# EAGLE board BRD a circuit (EAGLE 9.3.0)
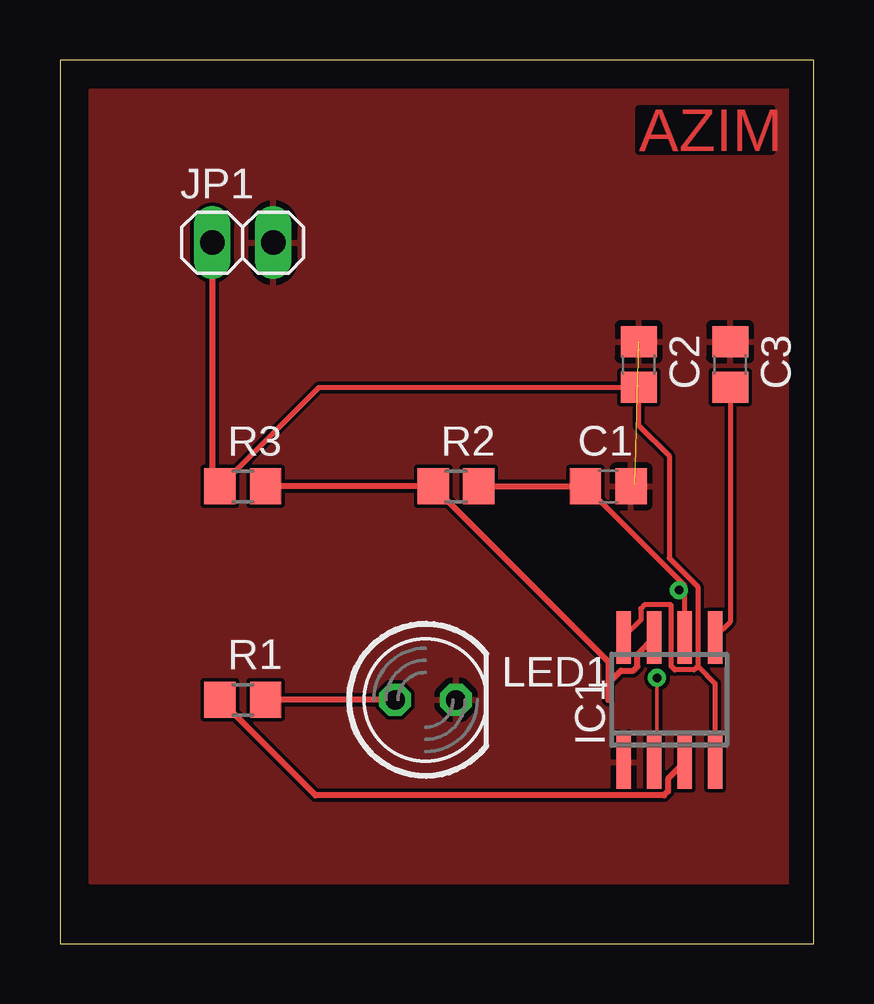
[diagram p0: board, top side]
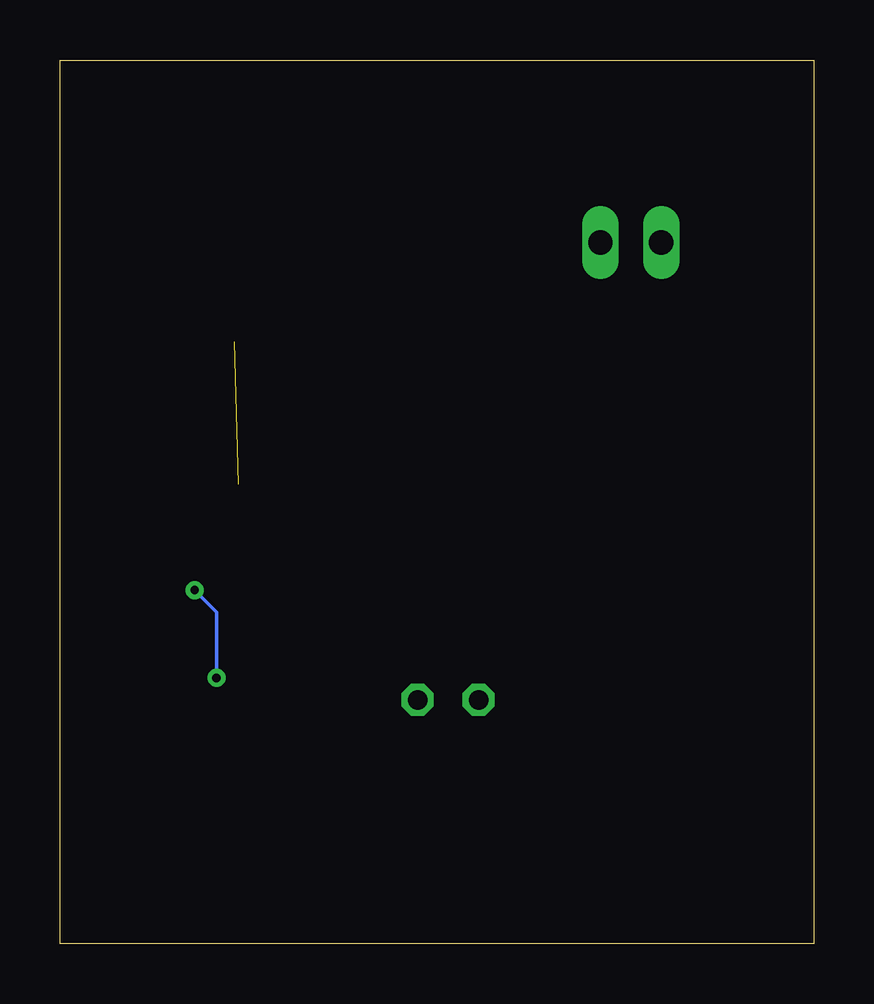
[diagram p1: board, bottom side, seen from below]

Size 31.42 x 36.82 mm. Coordinates in mm from the lower left corner, seen from the top.
Outline: 0,0 31.42,0 31.42,36.82 0,36.82 0,0
Copper layers (1*16): Top 0.035mm / dielectric 1.5mm / Bottom 0.035mm
Design rules "default": minimum track width 6mil, minimum drill 0.35mm, track to track 6mil, track to pad 6mil, pad to pad 6mil, via to via 6mil, smd to smd 6mil, copper to edge 40mil, drill to drill 6mil, minimum pad ring 10mil, minimum via ring 8mil, stop-mask expansion 4mil, vias tented up to drill 0mil, thermal gap 10mil

## Footprints (pad centres in the part's own frame; a part is rotated, then mirrored left to right if it is on the bottom)
C0805 = smd 1.3 x 1.5: 1 -0.95,0; 2 0.95,0
SO08 = smd 0.6 x 2.2: 1 -1.905,-2.6; 2 -0.635,-2.6; 3 0.635,-2.6; 4 1.905,-2.6; 5 1.905,2.6; 6 0.635,2.6; 7 -0.635,2.6; 8 -1.905,2.6
1X02 = drill 1.016 long: 1 -1.27,0; 2 1.27,0
LED5MM = drill 0.813 octagon: A -1.27,0; K 1.27,0
R0805 = smd 1.3 x 1.5: 1 -0.95,0; 2 0.95,0

## Placement (x,y rotation side)
C1  [C0805]  22.86,19.05 0 top
C2  0.01u  [C0805]  24.13,24.13 270 top
C3  0.01u  [C0805]  27.94,24.13 270 top
IC1  LM555D  [SO08]  25.4,10.16 0 top
JP1  [1X02]  7.62,29.21 0 top
LED1  [LED5MM]  15.24,10.16 0 top
R1  1800hm  [R0805]  7.62,10.16 0 top
R2  470k  [R0805]  16.51,19.05 0 top
R3  100k  [R0805]  7.62,19.05 0 top

## Library data of the parts
C1-C3 = rcl; SPICEPREFIX: C
IC1 = linear
JP1 = pinhead
LED1 = led
R1-R3 = rcl; SPICEPREFIX: R

## Nets
+5V: C2.2 IC1.4 IC1.8 JP1.1 R3.1
GND: C1.2 C2.1 C3.1 IC1.1 JP1.2 LED1.K
N$1: IC1.3 R1.1
N$2: IC1.7 R2.1 R3.2
N$3: C1.1 IC1.2 IC1.6 R2.2
N$5: C3.2 IC1.5
N$8: LED1.A R1.2

## Tracks (layer width: path | path; a pad name or v marks a point on that pad's centre or on a via)
+5V
  Top 0.203: R3.1 10.8,23.18 C2.2 24.13,21.59 25.4,20.32 25.4,16.06 26.59,14.87 26.59,11.55 | 26.59,11.55 26.44,11.41 25.63,11.41 25.48,11.55 25.48,14.11 24.36,14.11 24.21,13.97 24.21,13.48 IC1.8 | 26.59,11.55 27.3,10.84 IC1.4
  Top 0.254: JP1.1 6.35,19.37 R3.1
GND  (1 unrouted)
  Top 0.152: 23.98,19.13 23.98,19.15 C1.2
  pour Top: 1.27,35.56 31.75,35.56 31.75,2.54 1.27,2.54
N$1
  Top 0.254: IC1.3 25.34,6.87 25.34,6.34 25.18,6.18 10.65,6.18 R1.1
N$2
  Top 0.254: 22.86,10.85 22.86,11.75 R2.1 R3.2 | 22.86,10.16 22.86,10.85 | 22.86,10.85 23.39,11.38 23.91,11.38 24.07,11.54 24.07,12.07 IC1.7
N$3  (via drill 0.35)
  Top 0.152: v24.89,11.07 24.89,7.57 IC1.2 | 26.03,14.73 v25.81,14.73
  Top 0.203: C1.1 26.03,14.92 26.03,14.73 IC1.6
  Top 0.254: R2.2 C1.1
  Bottom 0.152: v24.89,11.07 24.89,13.82 v25.81,14.73
N$5
  Top 0.203: C3.2 27.94,13.4 IC1.5
N$8
  Top 0.254: LED1.A R1.2

## Text on the board
Top: AZIM